# EAGLE board gameboyzero-holiday (EAGLE 8.3.2)
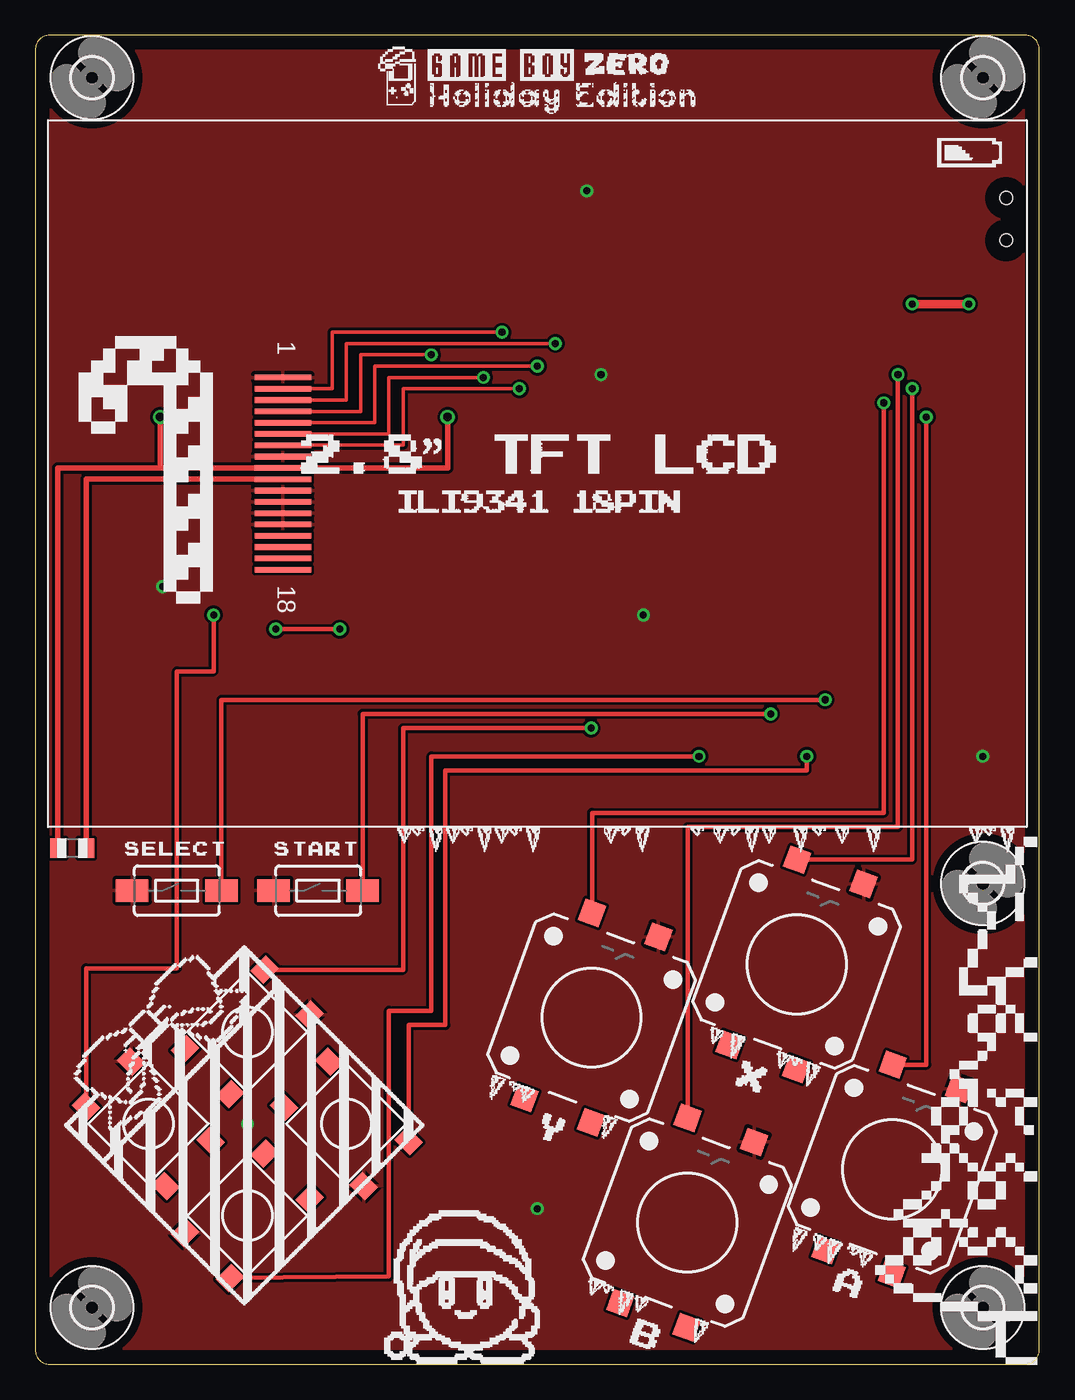
[diagram p0: board, top side]
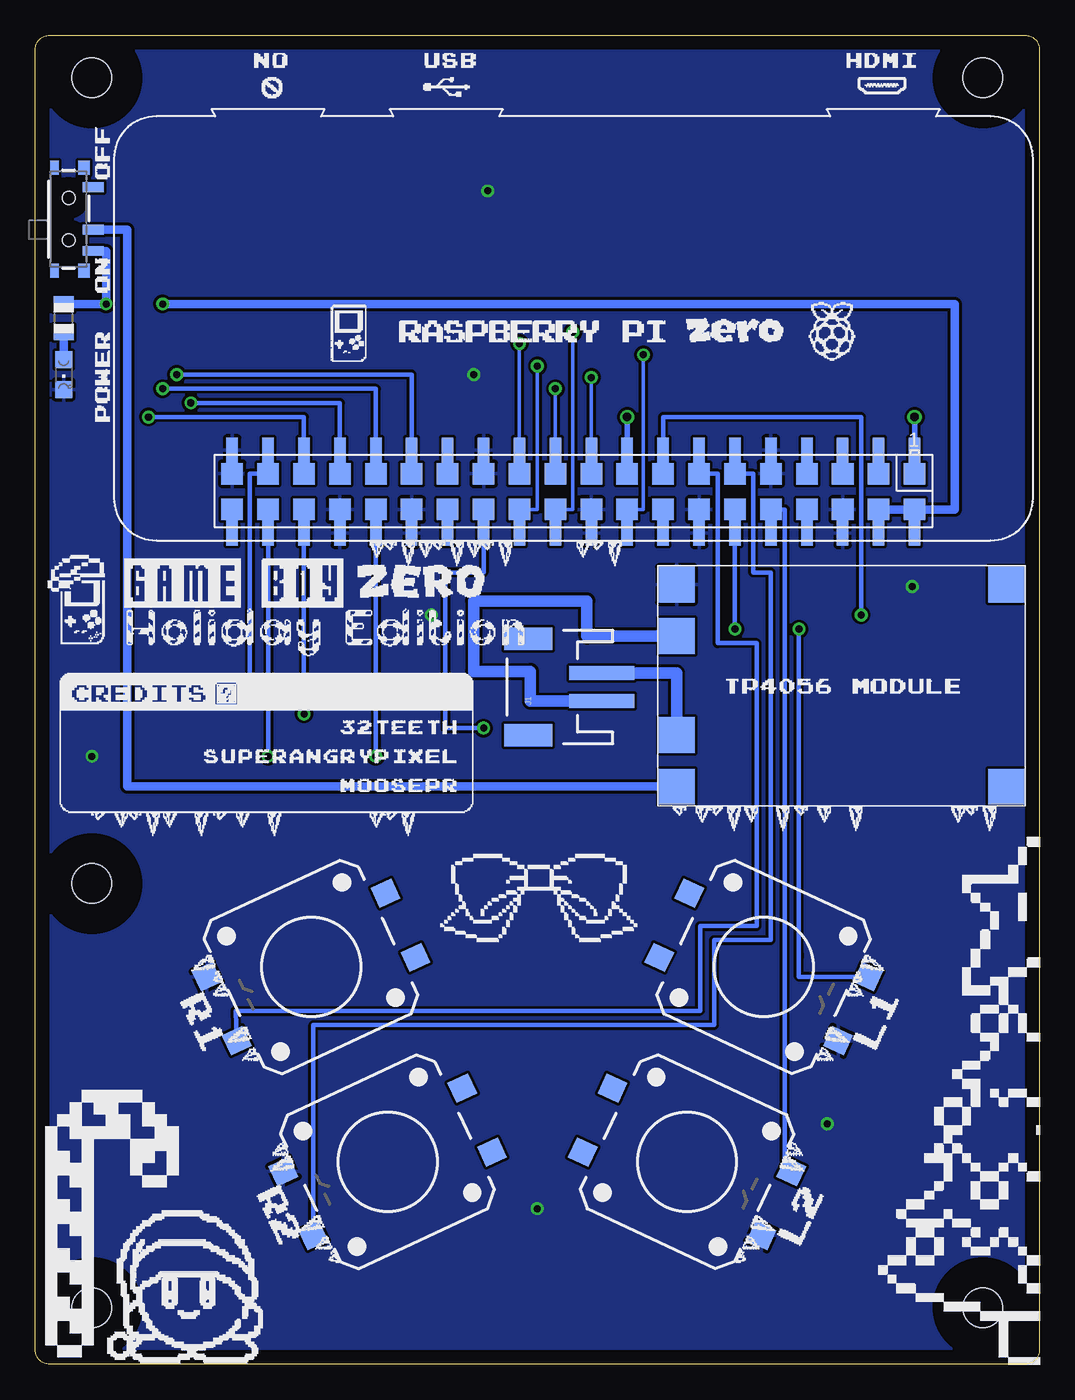
[diagram p1: board, bottom side, seen from below]

Size 71 x 94 mm. Coordinates in mm from the lower left corner, seen from the top.
Outline: 0,93 0,1 arc90 1,0 70,0 arc90 71,1 71,93 arc90 70,94 1,94 arc90 0,93
Copper layers (1*16): Top 0.035mm / dielectric 1.5mm / Bottom 0.035mm
Design rules "default": minimum track width 10mil, minimum drill 24mil, track to track 8mil, track to pad 8mil, pad to pad 8mil, via to via 8mil, smd to smd 8mil, copper to edge 40mil, drill to drill 8mil, minimum pad ring 10mil, minimum via ring 8mil, stop-mask expansion 4mil, vias tented up to drill 0mil, thermal gap 10mil

## Footprints (pad centres in the part's own frame; a part is rotated, then mirrored left to right if it is on the bottom)
TACTILE_SWITCH_SMD_12MM = smd 1.6 x 1.55: 1 6.975,-2.5; 2 -6.975,-2.5; 3 6.975,2.5; 4 -6.975,2.5
TACTILE_SWITCH_SMD_6.2MM_TALL = smd 1.55 x 1.3: A1 -3.975,-2.25; A2 3.975,-2.25; B1 -3.975,2.25; B2 3.975,2.25
TACTILE_SWITCH_SMD_6.0X3.5MM = smd 2.3 x 1.6: 1 -3.15,0; 2 3.15,0
2,8 = hole 2.8: 0,0
JST-2-SMD = smd 1 x 4.6: 1 -1,-3.7; 2 1,-3.7 | smd 1.6 x 3.4: NC1 -3.4,1.5; NC2 3.4,1.5
CHIPLED_0805 = smd 1.2 x 1.2: A 0,-1.05; C 0,1.05
RASPBERRYPI_BASTELSTUBE_V13_RASPI_BOARD_B+_FULL = smd 1.524 x 1.524: 1 8.382,25.273; 2 8.382,27.813; 3 10.922,25.273; 4 10.922,27.813; 5 13.462,25.273; 6 13.462,27.813; 7 16.002,25.273; 8 16.002,27.813; 9 18.542,25.273; 10 18.542,27.813; 11 21.082,25.273; 12 21.082,27.813; 13 23.622,25.273; 14 23.622,27.813; 15 26.162,25.273; 16 26.162,27.813; 17 28.702,25.273; 18 28.702,27.813; 19 31.242,25.273; 20 31.242,27.813; 21 33.782,25.273; 22 33.782,27.813; 23 36.322,25.273; 24 36.322,27.813; 25 38.862,25.273; 26 38.862,27.813; 27 41.402,25.273; 28 41.402,27.813; 29 43.942,25.273; 30 43.942,27.813; 31 46.482,25.273; 32 46.482,27.813; 33 49.022,25.273; 34 49.022,27.813; 35 51.562,25.273; 36 51.562,27.813; 37 54.102,25.273; 38 54.102,27.813; 39 56.642,25.273; 40 56.642,27.813 | smd 0.813 x 1.778: 41 8.382,23.622; 42 8.382,29.464; 43 10.922,23.622; 44 10.922,29.464; 45 13.462,23.622; 46 13.462,29.464; 47 16.002,23.622; 48 16.002,29.464; 49 18.542,23.622; 50 18.542,29.464; 51 21.082,23.622; 52 21.082,29.464; 53 23.622,23.622; 54 23.622,29.464; 55 26.162,23.622; 56 26.162,29.464; 57 28.702,23.622; 58 28.702,29.464; 59 31.242,23.622; 60 31.242,29.464; 61 33.782,23.622; 62 33.782,29.464; 63 36.322,23.622; 64 36.322,29.464; 65 38.862,23.622; 66 38.862,29.464; 67 41.402,23.622; 68 41.402,29.464; 69 43.942,23.622; 70 43.942,29.464; 71 46.482,23.622; 72 46.482,29.464; 73 49.022,23.622; 74 49.022,29.464; 75 51.562,23.622; 76 51.562,29.464; 77 54.102,23.622; 78 54.102,29.464; 79 56.642,23.622; 80 56.642,29.464
03962A = smd 2.54 x 2.54: B+ 12,1.35; B- 5,1.35; IN+ 15.65,24.65; IN- 1.35,24.65; OUT+ 15.65,1.35; OUT- 1.35,1.35
R0805 = smd 1.1 x 1.4: 1 -1,0; 2 1,0
SWITCH_SPST_SMD_A = smd 0.7 x 1.5: 1 -2.25,-1.75; 2 -0.75,-1.75; 3 2.25,-1.75 | smd 1 x 0.6: GND1 -3.65,1; GND3 3.65,1 | smd 1 x 0.8: GND2 -3.65,-1.1; GND4 3.65,-1.1 | hole 0.9: -1.5,0; 1.5,0
GAMEBOYZEROHANDHELDDISPLAYS-2.8 = smd 4 x 0.4: P$1 -18,6.8; P$2 -18,6; P$3 -18,5.2; P$4 -18,4.4; P$5 -18,3.6; P$6 -18,2.8; P$7 -18,2; P$8 -18,1.2; P$9 -18,0.4; P$10 -18,-0.4; P$11 -18,-1.2; P$12 -18,-2; P$13 -18,-2.8; P$14 -18,-3.6; P$15 -18,-4.4; P$16 -18,-5.2; P$17 -18,-6; P$18 -18,-6.8

## Placement (x,y rotation side)
BTN_A  MOMENTARY-SWITCH-SPST-SMD-12MM  [TACTILE_SWITCH_SMD_12MM]  60.59,13.78 70 top
BTN_B  MOMENTARY-SWITCH-SPST-SMD-12MM  [TACTILE_SWITCH_SMD_12MM]  46.09,10.02 70 top
BTN_DOWN  MOMENTARY-SWITCH-SPST-SMD-6.2MM-TALL  [TACTILE_SWITCH_SMD_6.2MM_TALL]  15,10.5 225 top
BTN_L1  MOMENTARY-SWITCH-SPST-SMD-12MM  [TACTILE_SWITCH_SMD_12MM]  19.5,28.09 335 bottom
BTN_L2  MOMENTARY-SWITCH-SPST-SMD-12MM  [TACTILE_SWITCH_SMD_12MM]  24.92,14.31 335 bottom
BTN_LEFT  MOMENTARY-SWITCH-SPST-SMD-6.2MM-TALL  [TACTILE_SWITCH_SMD_6.2MM_TALL]  8,17 135 top
BTN_R1  MOMENTARY-SWITCH-SPST-SMD-12MM  [TACTILE_SWITCH_SMD_12MM]  51.5,28.09 205 bottom
BTN_R2  MOMENTARY-SWITCH-SPST-SMD-12MM  [TACTILE_SWITCH_SMD_12MM]  46.08,14.31 205 bottom
BTN_RIGHT  MOMENTARY-SWITCH-SPST-SMD-6.2MM-TALL  [TACTILE_SWITCH_SMD_6.2MM_TALL]  22,17 315 top
BTN_SELECT  MOMENTARY-SWITCH-SPST-SMD-6.0X3.5MM  [TACTILE_SWITCH_SMD_6.0X3.5MM]  10,33.5 0 top
BTN_START  MOMENTARY-SWITCH-SPST-SMD-6.0X3.5MM  [TACTILE_SWITCH_SMD_6.0X3.5MM]  20,33.5 0 top
BTN_UP  MOMENTARY-SWITCH-SPST-SMD-6.2MM-TALL  [TACTILE_SWITCH_SMD_6.2MM_TALL]  15,23.5 45 top
BTN_X  MOMENTARY-SWITCH-SPST-SMD-12MM  [TACTILE_SWITCH_SMD_12MM]  53.83,28.28 70 top
BTN_Y  MOMENTARY-SWITCH-SPST-SMD-12MM  [TACTILE_SWITCH_SMD_12MM]  39.33,24.52 70 top
H1  MOUNT-HOLE2.8  [2,8]  4,4 0 top
H2  MOUNT-HOLE2.8  [2,8]  67,4 0 top
H3  MOUNT-HOLE2.8  [2,8]  67,34 0 top
H4  MOUNT-HOLE2.8  [2,8]  4,91 0 top
H5  MOUNT-HOLE2.8  [2,8]  67,91 0 top
J1  [JST-2-SMD]  34.65,47.9 90 bottom
LED1  [CHIPLED_0805]  69,70 180 bottom
PI1  RPI-ZERO  [RASPBERRYPI_BASTELSTUBE_V13_RASPI_BOARD_B+_FULL]  0.45,88.27 180 bottom
POWER1  03962A  [03962A]  27,56.5 270 bottom
R1  3R9  [R0805]  2.6,36.5 180 top
R2  100  [R0805]  69,74 90 bottom
S2  [SWITCH_SPST_SMD_A]  68.65,81 90 bottom
SCREEN1  GAMEBOYZEROHANDHELDDISPLAYS-2.8  [GAMEBOYZEROHANDHELDDISPLAYS-2.8]  35.5,63 0 top

## Library data of the parts
BTN_A BTN_B BTN_L1 BTN_L2 BTN_R1 BTN_R2 BTN_X BTN_Y = SparkFun-Switches; PROD_ID: SWCH-11967; SF_SKU: COM-12993
BTN_DOWN BTN_LEFT BTN_RIGHT BTN_UP = SparkFun-Switches; PROD_ID: SWCH-11966; SF_SKU: COM-12992
BTN_SELECT BTN_START = SparkFun-Switches; PROD_ID: SWCH-00815; SF_SKU: COM-08229
H1-H5 = holes
J1 = SparkFun-Connectors; BTM_NEG: -; BTM_POS: +; PROD_ID: CONN-11443; TOP_NEG: -; TOP_POS: +
LED1 R1 R2 = adafruit
PI1 = RPI-Zero
POWER1 = 03962A
S2 = SparkFun-Switches; PROD_ID: SWCH-10651; SF_SKU: COM-10860
SCREEN1 = GameboyZeroHandheldDisplays

## Nets
3V3: PI1.1 PI1.17 PI1.41 PI1.57 R1.2 SCREEN1.P$9
3V3100OHM: R1.1 SCREEN1.P$10
A: BTN_A.3 PI1.35 PI1.75
B: BTN_B.3 PI1.29 PI1.69
BATT+: J1.2 POWER1.B+
BATT-: J1.1 POWER1.B-
CSX: PI1.24 PI1.64 SCREEN1.P$5
D/CX: PI1.18 PI1.58 SCREEN1.P$4
DOWN: BTN_DOWN.B2 PI1.32 PI1.72
GND: BTN_A.1 BTN_B.1 BTN_DOWN.A2 BTN_L1.1 BTN_L2.1 BTN_LEFT.A2 BTN_R1.1 BTN_R2.1 BTN_RIGHT.A2 BTN_SELECT.1 BTN_START.1 BTN_UP.A2 BTN_X.1 BTN_Y.1 LED1.C PI1.6 PI1.9 PI1.14 PI1.20 PI1.25 PI1.30 PI1.34 PI1.39 PI1.46 PI1.49 PI1.54 PI1.60 PI1.65 PI1.70 PI1.74 PI1.79 POWER1.OUT- SCREEN1.P$1 SCREEN1.P$8 SCREEN1.P$11 SCREEN1.P$12 SCREEN1.P$13 SCREEN1.P$14
L1: BTN_L1.3 PI1.12 PI1.52
L2: BTN_L2.3 PI1.10 PI1.50
LED: LED1.A R2.1
LEFT: BTN_LEFT.B2 PI1.15 PI1.55
R1: BTN_R1.3 PI1.13 PI1.53
R2: BTN_R2.3 PI1.11 PI1.51
RESET: PI1.22 PI1.62 SCREEN1.P$2
RIGHT: BTN_RIGHT.B2 PI1.38 PI1.78
SCL: PI1.23 PI1.63 SCREEN1.P$3
SDI: PI1.19 PI1.59 SCREEN1.P$6
SDO: PI1.21 PI1.61 SCREEN1.P$7
SELECT: BTN_SELECT.2 PI1.37 PI1.77
START: BTN_START.2 PI1.36 PI1.76
SWITCH_IN+: POWER1.OUT+ S2.2
SWITCH_OUT+: PI1.2 PI1.4 PI1.42 PI1.44 R2.2 S2.1
UP: BTN_UP.B2 PI1.26 PI1.66
X: BTN_X.3 PI1.31 PI1.71
Y: BTN_Y.3 PI1.33 PI1.73

## Tracks (layer width: path | path; a pad name or v marks a point on that pad's centre or on a via)
3V3  (via drill 0.6)
  Top 0.406: R1.2 1.6,63.4 8.83,63.4 | 8.83,63.4 v8.83,67 | v29.15,67 29.15,63.4 SCREEN1.P$9 8.83,63.4
  Bottom 0.406: v8.83,67 PI1.41 PI1.1 | v29.15,67 PI1.57 PI1.17
3V3100OHM
  Top 0.406: R1.1 3.6,62.6 SCREEN1.P$10
A  (via drill 0.5)
  Top 0.305: BTN_A.3 63,21.19 v63,67
  Bottom 0.254: PI1.75 PI1.35
  Bottom 0.305: PI1.35 52.01,67 v63,67
B  (via drill 0.5)
  Top 0.305: BTN_B.3 46.13,38 61,38 v61,70
  Bottom 0.254: PI1.69 PI1.29
  Bottom 0.305: PI1.29 44.39,70 v61,70
BATT+
  Bottom 0.813: POWER1.B+ 25.65,48.9 J1.2
BATT-
  Bottom 0.813: POWER1.B- 32,51.5 32,54 40,54 40,49 36,49 36,46.9 J1.1
CSX  (via drill 0.5)
  Top 0.254: v35.5,70.6 24,70.6 24,66.6 SCREEN1.P$5
  Bottom 0.254: v35.5,70.6 35.5,60.46 PI1.24 PI1.64
D/CX  (via drill 0.5)
  Top 0.254: v28,71.4 23,71.4 23,67.4 SCREEN1.P$4
  Bottom 0.254: v28,71.4 28,60.46 PI1.18 PI1.58
DOWN  (via drill 0.5)
  Top 0.305: BTN_DOWN.B2 25,6.2 25,25 28,25 28,43 v46.93,43
  Bottom 0.254: PI1.32 46.93,59
  Bottom 0.305: 46.93,59 v46.93,43
  Bottom 0.406: PI1.72 46.93,59
GND  (via drill 0.5)
  other vias: 9,55 39,83 40,70 43,53 67,43 35.5,11 15,17
  pour Bottom: 0,0 0,94 71,94 71,0
  pour Top: 71,94 71,0 0,0 0,94
L1  (via drill 0.5)
  Top 0.305: v17,52 v21.53,52
  Bottom 0.254: PI1.12 21.53,59
  Bottom 0.305: 17,29 17,28.78 | 17,29 v17,52 | 21.53,59 v21.53,52 | BTN_L1.3 17,27.41 17,29
  Bottom 0.406: PI1.52 21.53,59
L2
  Bottom 0.305: PI1.10 18,60.46 18,13.63 BTN_L2.3
  Bottom 0.406: PI1.10 PI1.50
LED
  Bottom 0.61: LED1.A R2.1
LEFT  (via drill 0.5)
  Top 0.305: BTN_LEFT.B2 3.6,28 10,28 10,49 12.6,49 v12.6,53
  Bottom 0.305: v12.6,53 12.6,67 26.61,67 PI1.55 PI1.15
R1
  Bottom 0.254: PI1.13 PI1.53
  Bottom 0.305: BTN_R1.3 56.84,25 24,25 24,31 20,31 20,51 22.75,51 22.75,63 PI1.13
R2
  Bottom 0.254: PI1.11 PI1.51
  Bottom 0.305: BTN_R2.3 51.35,24 23,24 23,30 19,30 19,56 20.25,56 20.25,63 PI1.11
RESET  (via drill 0.5)
  Top 0.254: v33,73 21,73 21,69 SCREEN1.P$2
  Bottom 0.254: v33,73 33,60.46 PI1.22 PI1.62
RIGHT  (via drill 0.5)
  Top 0.305: BTN_RIGHT.B2 26.4,24 29,24 29,42 54.55,42 v54.55,43
  Bottom 0.254: PI1.38 54.55,59
  Bottom 0.305: 54.55,59 v54.55,43
  Bottom 0.406: PI1.78 54.55,59
SCL  (via drill 0.5)
  Top 0.254: SCREEN1.P$3 22,68.2 22,72.2 v36.77,72.2
  Bottom 0.254: PI1.23 | PI1.23 v36.77,72.2 | PI1.63 PI1.23
SDI  (via drill 0.5)
  Top 0.254: SCREEN1.P$6 25,65.8 25,69.8 v31.69,69.8
  Bottom 0.254: v31.69,69.8 PI1.59 PI1.19
SDO  (via drill 0.5)
  Top 0.254: SCREEN1.P$7 26,65 26,69 v34.23,69
  Bottom 0.254: v34.23,69 PI1.61 PI1.21
SELECT  (via drill 0.5)
  Top 0.305: BTN_SELECT.2 13.15,47 v55.85,47
  Bottom 0.254: PI1.77 PI1.37
  Bottom 0.305: PI1.37 55.85,63 v55.85,47
START  (via drill 0.5)
  Top 0.305: BTN_START.2 23.15,46 v52,46
  Bottom 0.254: PI1.36 52.01,59
  Bottom 0.305: 52.01,59 v52.01,46 v52,46
  Bottom 0.406: PI1.76 52.01,59
SWITCH_IN+
  Bottom 0.61: S2.2 64.5,80.25 64.5,40.85 POWER1.OUT+
SWITCH_OUT+  (via drill 0.5)
  Top 0.61: v62,75 v66,75
  Bottom 0.254: PI1.4 PI1.44 | PI1.2 PI1.42
  Bottom 0.61: R2.2 v66,75 66,78.75 S2.1 | PI1.4 PI1.2 6,60.46 6,75 v62,75
UP  (via drill 0.5)
  Top 0.305: BTN_UP.B2 26,27.9 26,45 v39.31,45
  Bottom 0.254: PI1.26 39.31,59
  Bottom 0.305: PI1.66 39.31,56 42,56 42,45 v39.31,45
  Bottom 0.406: 39.31,59 PI1.66
X  (via drill 0.5)
  Top 0.305: BTN_X.3 62,35.69 v62,69
  Bottom 0.254: PI1.71 PI1.31
  Bottom 0.305: PI1.31 46.93,69 v62,69
Y  (via drill 0.5)
  Top 0.305: BTN_Y.3 39.37,39 60,39 v60,68
  Bottom 0.254: PI1.73 PI1.33
  Bottom 0.305: PI1.33 49.47,68 v60,68